# Altium PCB BlueStone_Terminal_V2.11.PcbDoc (part 2 of 2)
Units mm, origin at the board's own origin, x right, y up, seen from the top; angles counter-clockwise.
Board outline 57 x 62 mm, 2 copper layers (TopLayer, BottomLayer); 39 components, 46 nets, 230 pads, 117 vias.
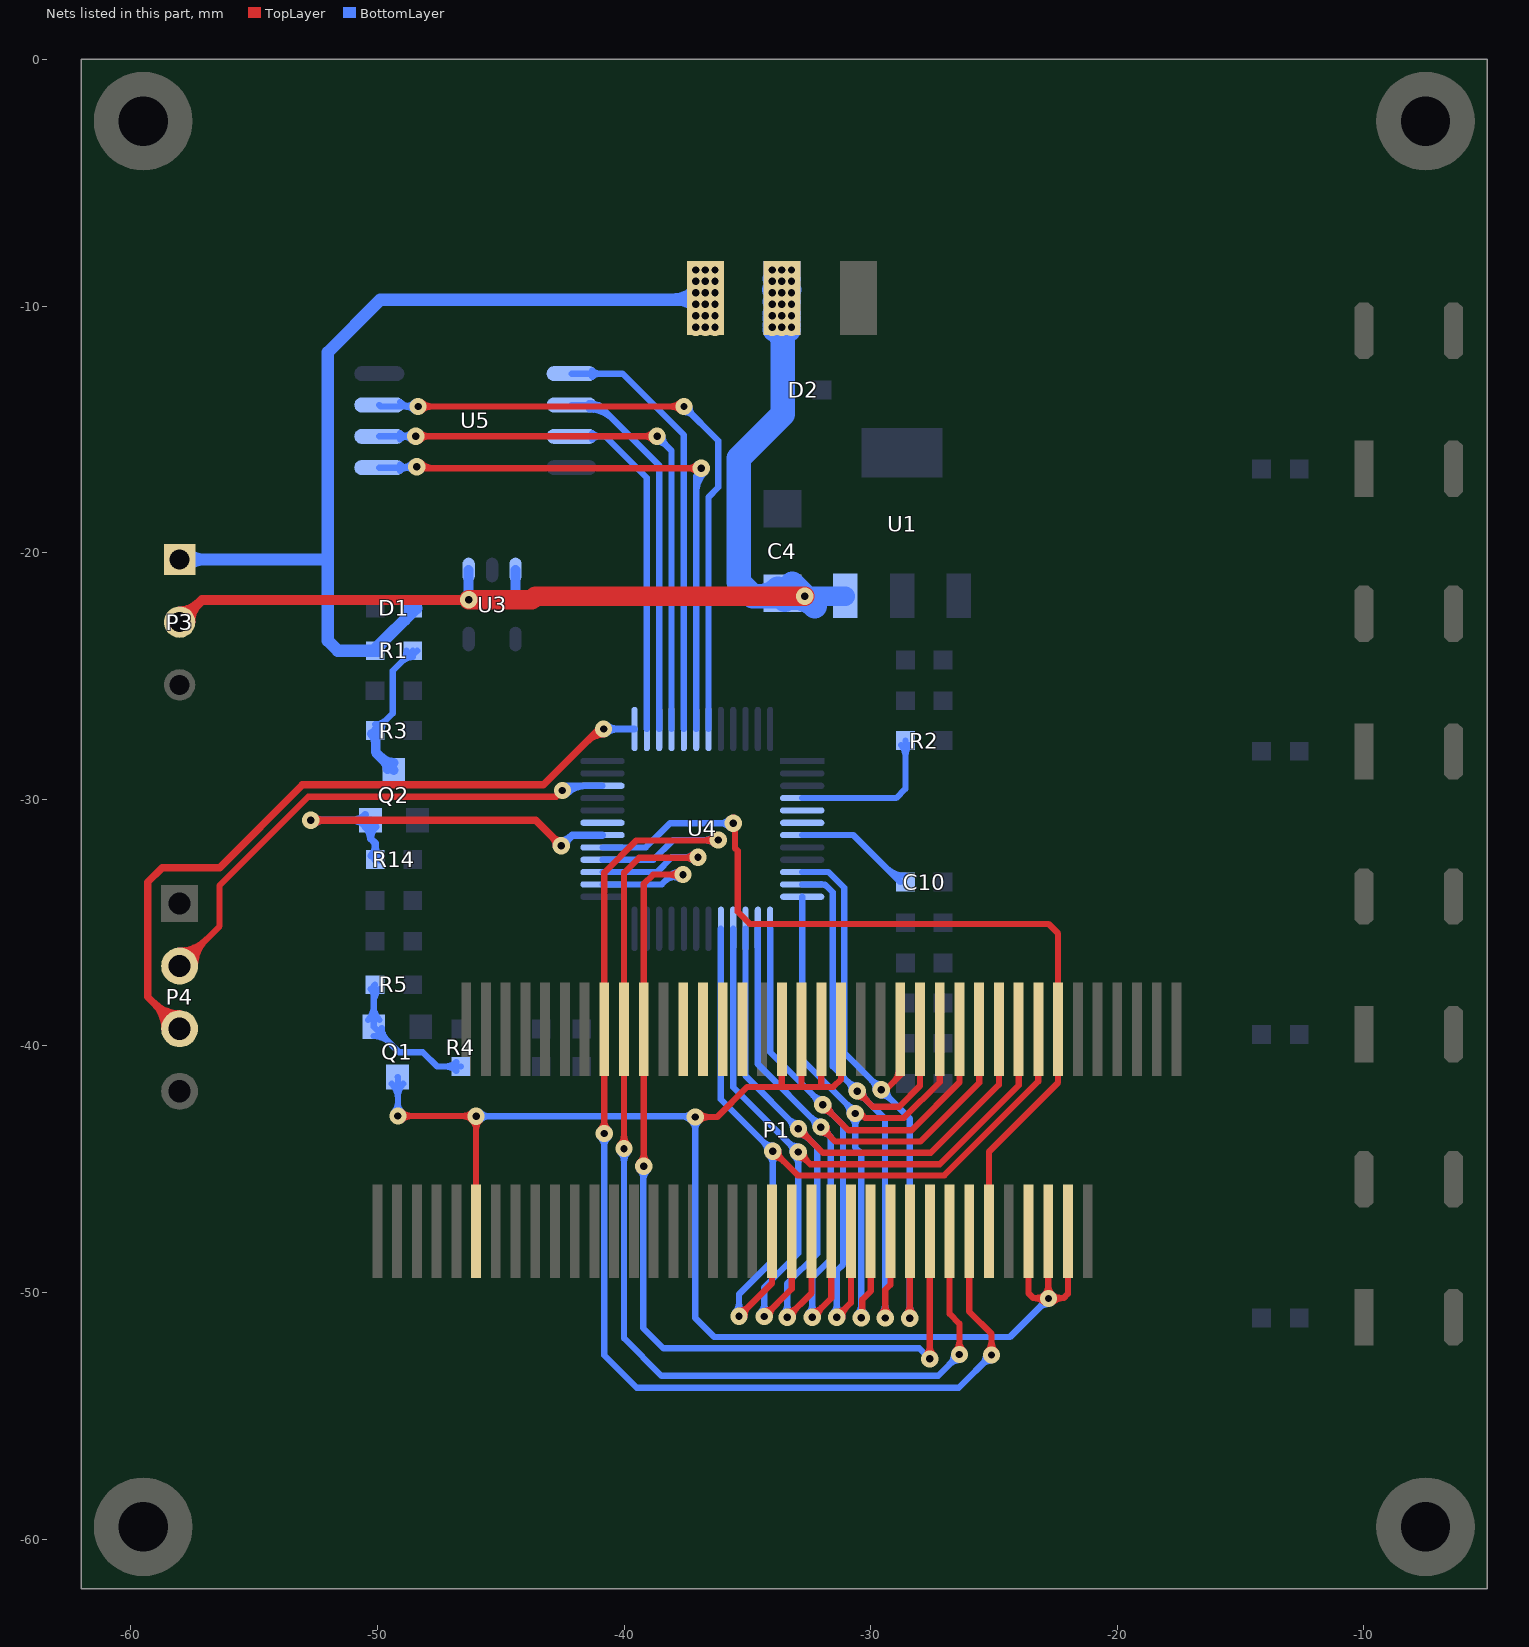
[diagram p2: the nets of this part, all layers, seen from the top]

## Via types
v1: diameter 0.7, hole 0.3, TopLayer to BottomLayer, tented both sides, 117 vias

## Nets (pads, with @x,y where several pads share a name; then routed paths per layer and width w, separated by ;. In a path a pad name is that pad's centre, name@x,y a point inside that pad or via, vN(x,y) a via of type N, cw(c..) or ccw(c..) an arc to the next point about the centre after c; other vN are vias at no path point) (continued)
LCD_DB8: P1.1_28 P1.2_23 U4.10 | length 34.8
  TopLayer w0.254: v1@-29.39,-41.78 -28.8,-41.19 P1.2_23@-28.8,-39.318 ; v1(-28.41,-51.04) P1.1_28@-28.41,-47.528 ; -28.41,-50.502 ccw(c-27.872,-50.502) -28.252,-50.882 cw(c-27.872,-50.502) -28.41,-50.502 ; -28.41,-50.502 cw(c-28.948,-50.502) -28.568,-50.882 ccw(c-28.948,-50.502) -28.41,-50.502 ; -29.046,-41.436 ccw(c-29.465,-41.018) -28.873,-41.018 cw(c-29.465,-41.018) -29.046,-41.436 ; -28.41,-49.418 cw(c-28.2,-49.418) -28.348,-49.269 ccw(c-28.2,-49.418) -28.41,-49.418
  BottomLayer w0.254: U4.10@-32.775,-32.95 -31.707,-32.95 -31.07,-33.587 -31.07,-40.28 v1(-29.57,-41.78) -28.41,-42.94 v1(-28.41,-51.04) ; -29.951,-41.399 ccw(c-29.57,-41.019) -29.57,-41.557 cw(c-29.57,-41.019) -29.951,-41.399 ; -29.951,-41.399 cw(c-30.331,-41.78) -29.793,-41.78 ccw(c-30.331,-41.78) -29.951,-41.399 ; -29.189,-42.161 ccw(c-29.57,-42.541) -29.57,-42.003 cw(c-29.57,-42.541) -29.189,-42.161 ; -29.189,-42.161 cw(c-28.809,-41.78) -29.347,-41.78 ccw(c-28.809,-41.78) -29.189,-42.161 ; -28.41,-50.502 ccw(c-27.872,-50.502) -28.252,-50.882 cw(c-27.872,-50.502) -28.41,-50.502 ; -28.41,-50.502 cw(c-28.948,-50.502) -28.568,-50.882 ccw(c-28.948,-50.502) -28.41,-50.502
LCD_DB9: P1.1_27 P1.2_24 U4.11 | length 37.6
  TopLayer w0.254: v1(-30.54,-41.83) -29.91,-42.46 -28.84,-42.46 -28,-41.62 P1.2_24@-28,-39.318 ; v1(-29.41,-51.03) -29.41,-49.89 -29.2,-49.68 P1.1_27@-29.2,-47.518 ; -30.159,-42.211 ccw(c-30.54,-42.591) -30.54,-42.053 cw(c-30.54,-42.591) -30.159,-42.211 ; -30.159,-42.211 cw(c-29.779,-41.83) -30.317,-41.83 ccw(c-29.779,-41.83) -30.159,-42.211 ; -29.41,-50.492 ccw(c-28.872,-50.492) -29.252,-50.872 cw(c-28.872,-50.492) -29.41,-50.492 ; -29.41,-50.492 cw(c-29.948,-50.492) -29.568,-50.872 ccw(c-29.948,-50.492) -29.41,-50.492
  BottomLayer w0.254: U4.11@-32.775,-33.45 -31.853,-33.45 -31.54,-33.763 -31.54,-40.83 v1(-30.54,-41.83) -29.42,-42.95 v1@-29.42,-51.03 ; -30.921,-41.449 ccw(c-30.54,-41.069) -30.54,-41.607 cw(c-30.54,-41.069) -30.921,-41.449 ; -30.921,-41.449 cw(c-31.301,-41.83) -30.763,-41.83 ccw(c-31.301,-41.83) -30.921,-41.449 ; -30.159,-42.211 ccw(c-30.54,-42.591) -30.54,-42.053 cw(c-30.54,-42.591) -30.159,-42.211 ; -30.159,-42.211 cw(c-29.779,-41.83) -30.317,-41.83 ccw(c-29.779,-41.83) -30.159,-42.211 ; U4.11@-32,-33.448 cw(c-32,-33.798) -31.753,-33.55 ccw(c-32,-33.798) U4.11@-32,-33.448 ; v1@-29.568,-50.872 ccw(c-29.924,-50.516) -29.42,-50.516 cw(c-29.924,-50.516) v1@-29.568,-50.872 ; -29.42,-50.467 ccw(c-28.847,-50.467) -29.252,-50.872 cw(c-28.847,-50.467) -29.42,-50.467
LCD_DB10: P1.1_26 P1.2_25 U4.12 | length 32.7
  TopLayer w0.254: v1(-30.38,-51.02) -30.343,-50.983 -30.343,-50.283 -30,-49.94 P1.1_26@-30,-47.518 ; v1@-30.35,-42.8 -30.232,-42.917 -28.651,-42.917 -27.2,-41.467 P1.2_25@-27.2,-39.318
  BottomLayer w0.254: U4.12@-32.775,-33.95 -32.775,-40.557 v1@-30.606,-42.726 ; v1(-30.62,-42.74) -30.62,-44.12 -30.38,-44.36 v1(-30.38,-51.02) ; -30.62,-43.278 ccw(c-31.158,-43.278) -30.778,-42.898 cw(c-31.158,-43.278) -30.62,-43.278 ; -30.62,-43.278 cw(c-30.082,-43.278) -30.462,-42.898 ccw(c-30.082,-43.278) -30.62,-43.278 ; -30.38,-50.482 ccw(c-29.842,-50.482) -30.222,-50.862 cw(c-29.842,-50.482) -30.38,-50.482 ; -30.38,-50.482 cw(c-30.918,-50.482) -30.538,-50.862 ccw(c-30.918,-50.482) -30.38,-50.482 ; -31.021,-42.311 cw(c-31.449,-42.74) -30.843,-42.74 ccw(c-31.449,-42.74) -31.021,-42.311 ; -30.953,-42.379 ccw(c-30.62,-42.046) -30.62,-42.517 cw(c-30.62,-42.046) -30.953,-42.379
LCD_DB11: P1.1_25 P1.2_26 U4.13 | length 38.2
  TopLayer w0.254: v1(-31.944,-42.386) -31.215,-43.115 ; v1@-31.764,-42.386 -31.764,-42.344 v1@-31.76,-42.34 ; v1(-31.38,-51) -30.8,-50.42 P1.1_25@-30.8,-47.518 ; -31.211,-43.111 -30.902,-43.42 -28.34,-43.42 -26.4,-41.48 P1.2_26@-26.4,-39.318 ; -31.563,-42.767 ccw(c-31.944,-43.148) -31.944,-42.609 cw(c-31.944,-43.148) -31.563,-42.767 ; -31.563,-42.767 cw(c-31.182,-42.386) -31.721,-42.386 ccw(c-31.182,-42.386) -31.563,-42.767 ; -30.999,-50.619 ccw(c-30.619,-51) -31.157,-51 cw(c-30.619,-51) -30.999,-50.619 ; -30.999,-50.619 cw(c-31.38,-50.239) -31.38,-50.777 ccw(c-31.38,-50.239) -30.999,-50.619
  BottomLayer w0.254: U4.13@-34.075,-35.25 -34.075,-40.255 v1(-31.944,-42.386) -31.12,-43.21 -31.12,-48.86 -31.38,-49.12 v1(-31.38,-51) ; -32.324,-42.006 ccw(c-31.944,-41.625) -31.944,-42.163 cw(c-31.944,-41.625) -32.324,-42.006 ; -32.324,-42.006 cw(c-32.705,-42.386) -32.167,-42.386 ccw(c-32.705,-42.386) -32.324,-42.006 ; -31.563,-42.767 ccw(c-31.944,-43.148) -31.944,-42.609 cw(c-31.944,-43.148) -31.563,-42.767 ; -31.563,-42.767 cw(c-31.182,-42.386) -31.721,-42.386 ccw(c-31.182,-42.386) -31.563,-42.767 ; -31.38,-50.462 ccw(c-30.842,-50.462) -31.222,-50.842 cw(c-30.842,-50.462) -31.38,-50.462 ; -31.38,-50.462 cw(c-31.918,-50.462) -31.538,-50.842 ccw(c-31.918,-50.462) -31.38,-50.462
LCD_DB12: P1.1_24 P1.2_27 U4.14 | length 39.5
  TopLayer w0.254: v1(-32.37,-51) -31.6,-50.23 P1.1_24@-31.6,-47.518 ; v1(-32.018,-43.289) -31.43,-43.877 -27.99,-43.877 -25.6,-41.487 P1.2_27@-25.6,-39.318 P1.2_27@-25.66,-39.378 ; v1@-31.838,-43.289 v1@-31.784,-43.289 ; -31.989,-50.619 ccw(c-31.609,-51) -32.147,-51 cw(c-31.609,-51) -31.989,-50.619 ; -31.989,-50.619 cw(c-32.37,-50.239) -32.37,-50.777 ccw(c-32.37,-50.239) -31.989,-50.619 ; -31.638,-43.67 ccw(c-32.018,-44.051) -32.018,-43.512 cw(c-32.018,-44.051) -31.638,-43.67 ; -31.638,-43.67 cw(c-31.257,-43.289) -31.795,-43.289 ccw(c-31.257,-43.289) -31.638,-43.67
  BottomLayer w0.254: U4.14@-34.575,-35.25 -34.575,-40.733 v1(-32.018,-43.289) -31.62,-43.688 -31.62,-48.64 -32.37,-49.39 v1(-32.37,-51) ; -32.399,-42.909 ccw(c-32.018,-42.528) -32.018,-43.066 cw(c-32.018,-42.528) -32.399,-42.909 ; -32.399,-42.909 cw(c-32.78,-43.289) -32.241,-43.289 ccw(c-32.78,-43.289) -32.399,-42.909 ; -32.37,-50.462 ccw(c-31.832,-50.462) -32.212,-50.842 cw(c-31.832,-50.462) -32.37,-50.462 ; -32.37,-50.462 cw(c-32.908,-50.462) -32.528,-50.842 ccw(c-32.908,-50.462) -32.37,-50.462 ; -31.638,-43.67 ccw(c-32.018,-44.051) -32.018,-43.512 cw(c-32.018,-44.051) -31.638,-43.67 ; -31.638,-43.67 cw(c-31.257,-43.289) -31.795,-43.289 ccw(c-31.257,-43.289) -31.638,-43.67
LCD_DB13: P1.1_23 P1.2_28 U4.15 | length 41
  TopLayer w0.254: v1(-33.38,-51) -32.4,-50.02 P1.1_23@-32.4,-47.518 ; v1(-32.93,-43.36) -32.91,-43.36 -31.935,-44.335 -27.565,-44.335 -24.8,-41.57 P1.2_28@-24.8,-40.018 ; -32.999,-50.619 ccw(c-32.619,-51) -33.157,-51 cw(c-32.619,-51) -32.999,-50.619 ; -32.999,-50.619 cw(c-33.38,-50.239) -33.38,-50.777 ccw(c-33.38,-50.239) -32.999,-50.619 ; v1@-32.93,-43.583 cw(c-32.93,-44.17) -32.515,-43.755 ccw(c-32.93,-44.17) v1@-32.93,-43.583 ; v1@-32.707,-43.36 ccw(c-32.217,-43.36) -32.563,-43.706 cw(c-32.217,-43.36) v1@-32.707,-43.36
  BottomLayer w0.254: U4.15@-35.075,-35.25 -35.075,-41.215 v1(-32.93,-43.36) -32.918,-43.36 -32.17,-44.108 -32.17,-48.42 -33.38,-49.63 v1(-33.38,-51) ; -33.38,-50.462 ccw(c-32.842,-50.462) -33.222,-50.842 cw(c-32.842,-50.462) -33.38,-50.462 ; -33.38,-50.462 cw(c-33.918,-50.462) -33.538,-50.842 ccw(c-33.918,-50.462) -33.38,-50.462 ; -33.311,-42.979 ccw(c-32.93,-42.599) -32.93,-43.137 cw(c-32.93,-42.599) -33.311,-42.979 ; -33.311,-42.979 cw(c-33.691,-43.36) -33.153,-43.36 ccw(c-33.691,-43.36) -33.311,-42.979 ; v1@-32.93,-43.583 cw(c-32.93,-44.15) -32.529,-43.749 ccw(c-32.93,-44.15) v1@-32.93,-43.583 ; v1@-32.707,-43.36 ccw(c-32.197,-43.36) -32.558,-43.72 cw(c-32.197,-43.36) v1@-32.707,-43.36
LCD_DB14: P1.1_22 P1.2_29 U4.16 | length 42.5
  TopLayer w0.254: v1(-34.32,-50.97) -33.2,-49.85 P1.1_22@-33.2,-47.518 ; v1(-32.94,-44.3) -32.448,-44.792 -27.202,-44.792 -24,-41.59 P1.2_29@-24,-39.318 ; v1@-32.772,-44.3 v1@-32.76,-44.3 ; -33.939,-50.589 ccw(c-33.559,-50.97) -34.097,-50.97 cw(c-33.559,-50.97) -33.939,-50.589 ; -33.939,-50.589 cw(c-34.32,-50.209) -34.32,-50.747 ccw(c-34.32,-50.209) -33.939,-50.589 ; -32.559,-44.681 ccw(c-32.94,-45.061) -32.94,-44.523 cw(c-32.94,-45.061) -32.559,-44.681 ; -32.559,-44.681 cw(c-32.179,-44.3) -32.717,-44.3 ccw(c-32.179,-44.3) -32.559,-44.681
  BottomLayer w0.254: U4.16@-35.575,-35.25 -35.575,-41.677 -32.952,-44.3 v1(-32.94,-44.3) -32.94,-47.9 -32.94,-48.41 -34.32,-49.79 v1(-34.32,-50.97) ; -34.32,-50.432 ccw(c-33.782,-50.432) -34.162,-50.812 cw(c-33.782,-50.432) -34.32,-50.432 ; -34.32,-50.432 cw(c-34.858,-50.432) -34.478,-50.812 ccw(c-34.858,-50.432) -34.32,-50.432 ; -32.94,-44.838 ccw(c-33.478,-44.838) -33.098,-44.458 cw(c-33.478,-44.838) -32.94,-44.838 ; -32.94,-44.838 cw(c-32.402,-44.838) -32.782,-44.458 ccw(c-32.402,-44.838) -32.94,-44.838 ; -33.341,-43.911 ccw(c-32.94,-43.51) -32.94,-44.077 cw(c-32.94,-43.51) -33.341,-43.911 ; -33.312,-43.94 cw(c-33.672,-44.3) -33.163,-44.3 ccw(c-33.672,-44.3) -33.312,-43.94
LCD_DB15: P1.1_21 P1.2_30 U4.17 | length 43.8
  TopLayer w0.254: v1(-35.34,-50.96) -34,-49.62 P1.1_21@-34,-47.518 ; v1(-33.97,-44.27) -33.932,-44.27 -32.953,-45.249 -27.012,-45.249 -23.2,-41.437 P1.2_30@-23.2,-40.018 ; -34.959,-50.579 ccw(c-34.579,-50.96) -35.117,-50.96 cw(c-34.579,-50.96) -34.959,-50.579 ; -34.959,-50.579 cw(c-35.34,-50.199) -35.34,-50.737 ccw(c-35.34,-50.199) -34.959,-50.579 ; v1@-33.97,-44.493 cw(c-33.97,-45.124) -33.524,-44.678 ccw(c-33.97,-45.124) v1@-33.97,-44.493 ; v1@-33.747,-44.27 ccw(c-33.301,-44.27) -33.616,-44.585 cw(c-33.301,-44.27) v1@-33.747,-44.27
  BottomLayer w0.254: U4.17@-36.075,-35.25 -36.075,-42.165 v1(-33.97,-44.27) -33.97,-48.7 -35.34,-50.07 v1(-35.34,-50.96) ; -35.34,-50.422 ccw(c-34.802,-50.422) -35.182,-50.802 cw(c-34.802,-50.422) -35.34,-50.422 ; -35.34,-50.422 cw(c-35.878,-50.422) -35.498,-50.802 ccw(c-35.878,-50.422) -35.34,-50.422 ; -34.351,-43.889 ccw(c-33.97,-43.509) -33.97,-44.047 cw(c-33.97,-43.509) -34.351,-43.889 ; -34.351,-43.889 cw(c-34.731,-44.27) -34.193,-44.27 ccw(c-34.731,-44.27) -34.351,-43.889 ; -33.97,-44.808 ccw(c-34.508,-44.808) -34.128,-44.428 cw(c-34.508,-44.808) -33.97,-44.808 ; -33.97,-44.808 cw(c-33.432,-44.808) -33.812,-44.428 ccw(c-33.432,-44.808) -33.97,-44.808
LCD_LEDK: P1.1_6 P1.1_34 P1.1_35 P1.1_36 P1.2_17 P1.2_18 P1.2_19 P1.2_20 Q1.3 | length 89.7
  TopLayer w0.254: v1(-49.17,-42.84) -46.01,-42.84 v1(-46,-42.85) P1.1_6@-46,-47.518 ; v1(-37.11,-42.88) -36.22,-42.88 -35,-41.66 -33.6,-41.66 ; P1.2_17@-33.6,-39.318 -33.6,-41.66 ; P1.2_18@-32.8,-39.318 -32.8,-41.66 ; P1.2_19@-32,-39.318 -32,-41.66 ; P1.2_20@-31.2,-39.318 -31.2,-41.35 -31.51,-41.66 -32,-41.66 ; P1.1_34@-23.6,-47.518 -23.6,-50.03 -23.41,-50.22 v1@-22.9,-50.22 ; P1.1_35@-22.8,-47.518 -22.8,-50.12 v1@-22.9,-50.22 ; P1.1_36@-22,-47.518 -22,-50.05 -22.17,-50.22 v1@-22.9,-50.22 ; -48.632,-42.84 ccw(c-48.632,-43.378) -49.012,-42.998 cw(c-48.632,-43.378) -48.632,-42.84 ; -48.632,-42.84 cw(c-48.632,-42.302) -49.012,-42.682 ccw(c-48.632,-42.302) -48.632,-42.84 ; v1@-46.158,-43.008 cw(c-46.538,-43.388) -46,-43.388 ; v1@-46.158,-43.008 ccw(c-46.563,-43.413) -46.563,-42.84 cw(c-46.563,-43.413) v1@-46.158,-43.008 ; v1@-46.158,-43.008 cw(c-46.538,-43.388) -46,-43.388 ; -46,-43.388 cw(c-45.462,-43.388) -45.842,-43.008 ccw(c-45.462,-43.388) -46,-43.388 ; -36.572,-42.88 ccw(c-36.572,-43.418) -36.952,-43.038 cw(c-36.572,-43.418) -36.572,-42.88 ; -36.572,-42.88 cw(c-36.572,-42.342) -36.952,-42.722 ccw(c-36.572,-42.342) -36.572,-42.88 ; -33.6,-41.66 -32.8,-41.66 ; -32.8,-41.66 -32,-41.66 ; v1@-22.948,-50.082 cw(c-23.28,-49.75) -23.28,-50.22 ccw(c-23.28,-49.75) v1@-22.948,-50.082 ; v1@-22.948,-50.082 ccw(c-23.304,-49.726) -22.8,-49.726 cw(c-23.304,-49.726) v1@-22.948,-50.082 ; v1@-22.632,-50.082 ccw(c-22.3,-49.75) -22.3,-50.22 cw(c-22.3,-49.75) v1@-22.632,-50.082 ; v1@-22.632,-50.082 cw(c-22.227,-49.677) -22.8,-49.677 ccw(c-22.227,-49.677) v1@-22.632,-50.082 ; -46.514,-42.84 ccw(c-46.514,-42.336) -46.158,-42.692 cw(c-46.514,-42.336) -46.514,-42.84 ; -23.377,-50.22 cw(c-23.377,-50.827) -22.948,-50.398 ccw(c-23.377,-50.827) -23.377,-50.22 ; v1@-22.632,-50.398 cw(c-22.203,-50.827) -22.203,-50.22 ccw(c-22.203,-50.827) v1@-22.632,-50.398
  BottomLayer w0.254: Q1.3@-49.185,-41.257 -49.17,-41.272 v1(-49.17,-42.84) ; v1(-46,-42.85) -37.14,-42.85 v1(-37.11,-42.88) -37.11,-51.03 -36.34,-51.8 -24.35,-51.8 v1(-22.79,-50.24) ; -49.17,-42.302 ccw(c-48.632,-42.302) -49.012,-42.682 cw(c-48.632,-42.302) -49.17,-42.302 ; -49.17,-42.302 cw(c-49.708,-42.302) -49.328,-42.682 ccw(c-49.708,-42.302) -49.17,-42.302 ; -45.462,-42.85 ccw(c-45.462,-43.388) -45.842,-43.008 cw(c-45.462,-43.388) -45.462,-42.85 ; -45.462,-42.85 cw(c-45.462,-42.312) -45.842,-42.692 ccw(c-45.462,-42.312) -45.462,-42.85 ; v1@-37.268,-43.038 cw(c-37.648,-43.418) -37.11,-43.418 ; v1@-37.268,-43.038 ccw(c-37.721,-43.491) -37.721,-42.85 cw(c-37.721,-43.491) v1@-37.268,-43.038 ; v1@-37.268,-43.038 cw(c-37.648,-43.418) -37.11,-43.418 ; -37.11,-43.418 cw(c-36.572,-43.418) -36.952,-43.038 ccw(c-36.572,-43.418) -37.11,-43.418 ; -23.171,-50.621 ccw(c-23.551,-50.24) -23.013,-50.24 cw(c-23.551,-50.24) -23.171,-50.621 ; -23.171,-50.621 cw(c-22.79,-51.001) -22.79,-50.463 ccw(c-22.79,-51.001) -23.171,-50.621 ; Q1.3@-49.418,-41.533 cw(c-50.018,-42.133) -49.17,-42.133 ccw(c-50.018,-42.133) Q1.3@-49.418,-41.533 ; -49.17,-42.061 cw(c-48.423,-42.061) -48.951,-41.533 ccw(c-48.423,-42.061) -49.17,-42.061 ; -37.576,-42.85 ccw(c-37.576,-42.414) -37.268,-42.722 cw(c-37.576,-42.414) -37.576,-42.85
LCD_RD: P1.1_29 P1.2_10 U4.26 | length 53.1
  TopLayer w0.254: v1(-39.2,-44.88) P1.2_10@-39.2,-39.318 ; P1.2_10@-39.2,-40.018 P1.2_10@-39.2,-39.318 ; v1(-37.61,-33.05) -38.82,-33.05 -39.2,-33.43 P1.2_10@-39.2,-39.318 ; v1(-27.6,-52.69) P1.1_29@-27.6,-47.518 ; -39.2,-44.342 ccw(c-38.662,-44.342) -39.042,-44.722 cw(c-38.662,-44.342) -39.2,-44.342 ; -39.2,-44.342 cw(c-39.738,-44.342) -39.358,-44.722 ccw(c-39.738,-44.342) -39.2,-44.342 ; -38.148,-33.05 ccw(c-38.148,-32.512) -37.767,-32.893 cw(c-38.148,-32.512) -38.148,-33.05 ; -38.148,-33.05 cw(c-38.148,-33.589) -37.767,-33.208 ccw(c-38.148,-33.589) -38.148,-33.05 ; -27.6,-52.152 ccw(c-27.062,-52.152) -27.442,-52.532 cw(c-27.062,-52.152) -27.6,-52.152 ; -27.6,-52.152 cw(c-28.138,-52.152) -27.758,-52.532 ccw(c-28.138,-52.152) -27.6,-52.152
  BottomLayer w0.254: U4.26@-40.875,-33.45 -38.47,-33.45 -38.07,-33.05 ; v1(-39.2,-44.88) -39.22,-44.9 -39.22,-51.44 -38.403,-52.257 -28.033,-52.257 v1(-27.6,-52.69) ; v1(-37.61,-33.05) -38.07,-33.05 ; -38.07,-33.05 ccw(c-38.07,-32.686) -37.785,-32.912 cw(c-38.07,-32.686) -38.07,-33.05 ; -38.07,-33.05 cw(c-38.07,-33.414) -37.785,-33.188 ccw(c-38.07,-33.414) -38.07,-33.05 ; v1@-39.358,-45.038 cw(c-39.69,-45.37) -39.22,-45.37 ccw(c-39.69,-45.37) v1@-39.358,-45.038 ; -39.22,-45.467 cw(c-38.613,-45.467) -39.042,-45.038 ccw(c-38.613,-45.467) -39.22,-45.467 ; -38.302,-33.282 cw(c-37.664,-33.92) -37.608,-33.019 ccw(c-37.664,-33.92) -38.302,-33.282 ; -38.3,-33.28 cw(c-37.991,-33.59) -37.738,-33.232 ccw(c-37.991,-33.59) -38.3,-33.28 ; -38.087,-33.067 cw(c-37.814,-33.34) -37.592,-33.025 ccw(c-37.814,-33.34) -38.087,-33.067
LCD_RESET: P1.1_32 P1.2_31 U4.29 | length 37.9
  TopLayer w0.254: v1@-35.57,-30.74 v1(-35.57,-30.97) -35.5,-31.04 -35.5,-31.98 -35.39,-32.09 -35.39,-34.56 -34.9,-35.05 -22.79,-35.05 -22.4,-35.44 P1.2_31@-22.4,-39.318 -22.4,-41.48 -25.2,-44.28 P1.1_32@-25.2,-47.518
  BottomLayer w0.254: U4.29@-40.875,-31.95 -39.116,-31.95 -38.136,-30.97 v1(-35.57,-30.97) ; -36.108,-30.97 ccw(c-36.108,-30.432) -35.728,-30.812 cw(c-36.108,-30.432) -36.108,-30.97 ; -36.108,-30.97 cw(c-36.108,-31.508) -35.728,-31.128 ccw(c-36.108,-31.508) -36.108,-30.97
LCD_RS: P1.1_31 P1.2_8 U4.28 | length 62.8
  TopLayer w0.254: v1(-40.8,-43.55) P1.2_8@-40.8,-39.318 ; P1.2_8@-40.8,-40.018 -40.8,-32.97 -39.5,-31.67 -36.2,-31.67 v1(-36.18,-31.65) ; P1.1_31@-26,-47.518 -26,-50.77 -25.1,-51.67 v1(-25.1,-52.53) ; -40.8,-43.012 ccw(c-40.262,-43.012) -40.642,-43.392 cw(c-40.262,-43.012) -40.8,-43.012 ; -40.8,-43.012 cw(c-41.338,-43.012) -40.958,-43.392 ccw(c-41.338,-43.012) -40.8,-43.012 ; -25.1,-51.992 ccw(c-24.562,-51.992) -24.942,-52.372 cw(c-24.562,-51.992) -25.1,-51.992 ; -25.1,-51.992 cw(c-25.638,-51.992) -25.258,-52.372 ccw(c-25.638,-51.992) -25.1,-51.992 ; -36.766,-31.67 ccw(c-36.766,-31.064) -36.337,-31.493 cw(c-36.766,-31.064) -36.766,-31.67 ; -36.67,-31.67 cw(c-36.67,-32.141) -36.337,-31.808 ccw(c-36.67,-32.141) -36.67,-31.67
  BottomLayer w0.254: U4.28@-40.875,-32.45 -38.81,-32.45 -38.01,-31.65 v1(-36.18,-31.65) ; v1(-40.8,-43.55) -40.8,-52.54 -39.48,-53.86 -26.43,-53.86 v1(-25.1,-52.53) ; -40.8,-44.088 ccw(c-41.338,-44.088) -40.958,-43.708 cw(c-41.338,-44.088) -40.8,-44.088 ; -40.8,-44.088 cw(c-40.262,-44.088) -40.642,-43.708 ccw(c-40.262,-44.088) -40.8,-44.088 ; -36.718,-31.65 ccw(c-36.718,-31.112) -36.337,-31.493 cw(c-36.718,-31.112) -36.718,-31.65 ; -36.718,-31.65 cw(c-36.718,-32.189) -36.337,-31.808 ccw(c-36.718,-32.189) -36.718,-31.65 ; -25.481,-52.911 ccw(c-25.861,-52.53) -25.323,-52.53 cw(c-25.861,-52.53) -25.481,-52.911 ; -25.481,-52.911 cw(c-25.1,-53.291) -25.1,-52.753 ccw(c-25.1,-53.291) -25.481,-52.911
LCD_RW: P1.1_30 P1.2_9 U4.27 | length 56.8
  TopLayer w0.254: v1(-40,-44.16) P1.2_9@-40,-39.318 ; P1.2_9@-40,-40.018 P1.2_9@-40,-39.318 ; v1(-37,-32.35) -37.02,-32.37 -39.39,-32.37 -40,-32.98 P1.2_9@-40,-39.318 ; P1.1_30@-26.8,-47.518 -26.8,-50.86 -26.4,-51.26 v1(-26.4,-52.51) ; -40,-43.622 ccw(c-39.462,-43.622) -39.842,-44.002 cw(c-39.462,-43.622) -40,-43.622 ; -40,-43.622 cw(c-40.538,-43.622) -40.158,-44.002 ccw(c-40.538,-43.622) -40,-43.622 ; -26.4,-51.972 ccw(c-25.862,-51.972) -26.242,-52.352 cw(c-25.862,-51.972) -26.4,-51.972 ; -26.4,-51.972 cw(c-26.938,-51.972) -26.558,-52.352 ccw(c-26.938,-51.972) -26.4,-51.972 ; -37.586,-32.37 ccw(c-37.586,-31.764) -37.157,-32.193 cw(c-37.586,-31.764) -37.586,-32.37 ; -37.49,-32.37 cw(c-37.49,-32.841) -37.157,-32.508 ccw(c-37.49,-32.841) -37.49,-32.37
  BottomLayer w0.254: U4.27@-40.875,-32.95 -38.663,-32.95 -38.063,-32.35 v1(-37,-32.35) ; v1(-40,-44.16) -40,-51.853 -38.483,-53.37 -27.318,-53.37 -27.26,-53.37 v1(-26.4,-52.51) ; -40,-44.698 ccw(c-40.538,-44.698) -40.158,-44.318 cw(c-40.538,-44.698) -40,-44.698 ; -40,-44.698 cw(c-39.462,-44.698) -39.842,-44.318 ccw(c-39.462,-44.698) -40,-44.698 ; -37.538,-32.35 ccw(c-37.538,-31.812) -37.157,-32.193 cw(c-37.538,-31.812) -37.538,-32.35 ; -37.538,-32.35 cw(c-37.538,-32.889) -37.157,-32.508 ccw(c-37.538,-32.889) -37.538,-32.35 ; -26.781,-52.891 ccw(c-27.161,-52.51) -26.623,-52.51 cw(c-27.161,-52.51) -26.781,-52.891 ; -26.781,-52.891 cw(c-26.4,-53.271) -26.4,-52.733 ccw(c-26.4,-53.271) -26.781,-52.891
NetC10_1: C10.1 U4.7 | length 6.5
  BottomLayer w0.254: U4.7@-32.775,-31.45 -30.695,-31.45 C10.1@-28.79,-33.355 ; -29.364,-32.781 ccw(c-28.592,-32.01) -28.592,-33.101 cw(c-28.592,-32.01) -29.364,-32.781
NetQ1_1: Q1.1 R4.1 R5.2 | length 14.8
  BottomLayer w0.254: R5.2@-50.1,-37.515 -50.15,-37.565 Q1.1@-50.15,-39.225 -49.125,-40.25 -48.16,-40.25 -47.576,-40.834 R4.1@-46.625,-40.834 ; -50.15,-38.385 ccw(c-49.353,-38.385) -49.917,-38.949 cw(c-49.353,-38.385) -50.15,-38.385 ; -50.15,-38.385 cw(c-50.947,-38.385) -50.383,-38.949 ccw(c-50.947,-38.385) -50.15,-38.385 ; -47.238,-40.834 ccw(c-47.238,-40.221) -46.805,-40.654 cw(c-47.238,-40.221) -47.238,-40.834 ; -47.238,-40.834 cw(c-47.238,-41.447) -46.805,-41.013 ccw(c-47.238,-41.447) -47.238,-40.834 ; R5.2@-50.274,-37.695 cw(c-50.572,-37.993) -50.15,-37.993 ccw(c-50.572,-37.993) R5.2@-50.274,-37.695 ; Q1.1@-50.15,-39.598 cw(c-50.15,-40.498) -49.513,-39.862 ccw(c-50.15,-40.498) Q1.1@-50.15,-39.598 ; -50.15,-38.263 cw(c-49.346,-38.263) -49.914,-37.695 ccw(c-49.346,-38.263) -50.15,-38.263 ; Q1.1@-49.82,-39.268 ccw(c-49.126,-39.268) -49.617,-39.758 cw(c-49.126,-39.268) Q1.1@-49.82,-39.268
NetQ2_3: Q2.3 R1.2 R3.1 | length 12.5
  BottomLayer w0.254: R3.1@-50.065,-27.21 -50.07,-27.205 -49.381,-26.516 -49.381,-24.79 R1.2@-48.566,-23.975 ; R1.2@-48.478,-24.063 R1.2@-48.39,-23.975 ; -49,-24.409 ccw(c-49.433,-23.975) -48.82,-23.975 cw(c-49.433,-23.975) -49,-24.409 ; -49,-24.409 cw(c-48.566,-24.842) -48.566,-24.229 ccw(c-48.566,-24.842) -49,-24.409 ; R3.1@-50.09,-26.956 ccw(c-50.09,-26.307) -49.631,-26.766 cw(c-50.09,-26.307) R3.1@-50.09,-26.956 ; R3.1@-49.836,-27.21 cw(c-49.259,-27.21) -49.667,-26.802 ccw(c-49.259,-27.21) R3.1@-49.836,-27.21
  BottomLayer w0.4: R3.1@-50.065,-27.21 -50.065,-28.093 Q2.3@-49.34,-28.818 ; R3.1@-50.218,-27.338 cw(c-50.587,-27.707) -50.065,-27.707 ccw(c-50.587,-27.707) R3.1@-50.218,-27.338 ; -49.852,-28.306 ccw(c-49.34,-27.794) -49.34,-28.518 cw(c-49.34,-27.794) -49.852,-28.306 ; Q2.3@-49.749,-28.409 cw(c-50.115,-28.775) -49.597,-28.775 ccw(c-50.115,-28.775) Q2.3@-49.749,-28.409
NetR2_1: R2.1 U4.4 | length 8.2
  BottomLayer w0.254: U4.4@-32.775,-29.95 -28.97,-29.95 -28.59,-29.57 R2.1@-28.59,-27.62 ; -28.59,-28.233 ccw(c-29.203,-28.233) -28.77,-27.8 cw(c-29.203,-28.233) -28.59,-28.233 ; -28.59,-28.233 cw(c-27.977,-28.233) -28.41,-27.8 ccw(c-27.977,-28.233) -28.59,-28.233
OUART_IN: D1.2 P3.1 pad.0@-36.69,-9.67 R1.1 | length 60.2
  BottomLayer w0.5: P3.1@-58.02,-20.275 -52.065,-20.275 ; D1.2@-48.426,-22.25 -50.05,-23.874 -50.05,-23.975 -51.605,-23.975 -52.01,-23.57 -52.01,-11.87 -49.88,-9.74 pad.0@-36.7,-9.74 ; -57.091,-20.275 ccw(c-57.091,-21.204) -57.748,-20.547 cw(c-57.091,-21.204) -57.091,-20.275 ; -57.091,-20.275 cw(c-57.091,-19.346) -57.748,-20.003 ccw(c-57.091,-19.346) -57.091,-20.275 ; pad.0@-36.7,-9.74 ccw(c-36.7,-10.047) -36.994,-9.959 cw(c-36.7,-10.047) pad.0@-36.7,-9.74 ; pad.0@-36.7,-9.74 cw(c-36.7,-9.45) -36.99,-9.461 ccw(c-36.7,-9.45) pad.0@-36.7,-9.74 ; pad.0@-36.7,-9.74 ccw(c-36.7,-9.45) -36.41,-9.461 cw(c-36.7,-9.45) pad.0@-36.7,-9.74 ; pad.0@-36.7,-9.74 cw(c-36.7,-10.047) -36.406,-9.959 ccw(c-36.7,-10.047) pad.0@-36.7,-9.74 ; R1.1@-49.959,-23.975 cw(c-49.495,-23.975) -49.823,-23.647 ccw(c-49.495,-23.975) R1.1@-49.959,-23.975 ; -48.889,-22.713 ccw(c-49.351,-22.25) -48.697,-22.25 cw(c-49.351,-22.25) -48.889,-22.713 ; -38.066,-9.74 ccw(c-38.066,-8.294) -37.044,-9.316 cw(c-38.066,-8.294) -38.066,-9.74 ; -37.995,-9.74 ccw(c-37.995,-8.56) -37.161,-9.394 cw(c-37.995,-8.56) -37.995,-9.74 ; -37.79,-9.74 cw(c-37.79,-10.63) -37.161,-10.001 ccw(c-37.79,-10.63) -37.79,-9.74 ; -37.728,-9.74 cw(c-37.728,-10.708) -37.044,-10.024 ccw(c-37.728,-10.708) -37.728,-9.74 ; -37.605,-9.74 ccw(c-37.605,-8.56) -36.771,-9.394 cw(c-37.605,-8.56) -37.605,-9.74 ; -37.473,-9.815 cw(c-37.372,-9.845) -37.372,-9.74 ccw(c-37.372,-9.845) -37.473,-9.815 ; pad.0@-37.4,-9.74 cw(c-37.4,-10.63) -36.771,-10.001 ccw(c-37.4,-10.63) pad.0@-37.4,-9.74 ; pad.0@-37.215,-9.74 ccw(c-37.215,-8.56) -36.381,-9.394 cw(c-37.215,-8.56) pad.0@-37.215,-9.74 ; pad.0@-37.01,-9.74 cw(c-37.01,-10.63) -36.381,-10.001 ccw(c-37.01,-10.63) pad.0@-37.01,-9.74
  other v1: -37.09,-10.86 -36.7,-10.86 -36.31,-10.86 -37.09,-10.395 -36.7,-10.395 -36.31,-10.395 -37.09,-9.93 -36.7,-9.93 -36.31,-9.93 -37.09,-9.465 -36.7,-9.465 -36.31,-9.465 -37.09,-9 -36.7,-9 -36.31,-9 -37.09,-8.535 -36.7,-8.535 -36.31,-8.535
RXD: U4.31
SPI_C\S\: U4.42 U5.1 | length 33.1
  TopLayer w0.254: v1(-48.401,-16.51) -48.341,-16.57 v1(-36.87,-16.57) ; -37.408,-16.57 ccw(c-37.408,-16.032) -37.028,-16.412 cw(c-37.408,-16.032) -37.408,-16.57 ; -37.408,-16.57 cw(c-37.408,-17.108) -37.028,-16.728 ccw(c-37.408,-17.108) -37.408,-16.57 ; v1@-48.243,-16.668 cw(c-48.007,-16.904) -48.007,-16.57 ccw(c-48.007,-16.904) v1@-48.243,-16.668 ; v1@-48.243,-16.352 ccw(c-47.718,-15.827) -47.718,-16.57 cw(c-47.718,-15.827) v1@-48.243,-16.352
  BottomLayer w0.254: U5.1@-49.925,-16.55 -48.441,-16.55 v1(-48.401,-16.51) ; U4.42@-37.075,-27.15 -37.075,-16.895 -36.87,-16.69 v1(-36.87,-16.57) ; -48.785,-16.55 ccw(c-48.785,-16.979) -49.088,-16.676 cw(c-48.785,-16.979) -48.785,-16.55 ; -48.785,-16.55 cw(c-48.785,-16.121) -49.088,-16.424 ccw(c-48.785,-16.121) -48.785,-16.55 ; U5.1@-49.036,-16.55 ccw(c-49.036,-15.875) -48.559,-16.352 cw(c-49.036,-15.875) U5.1@-49.036,-16.55 ; -48.843,-16.55 cw(c-48.843,-16.952) -48.559,-16.668 ccw(c-48.843,-16.952) -48.843,-16.55 ; -37.075,-17.603 cw(c-35.836,-17.603) -36.712,-16.728 ccw(c-35.836,-17.603) -37.075,-17.603 ; -37.075,-16.99 cw(c-36.45,-16.99) -36.892,-16.548 ccw(c-36.45,-16.99) -37.075,-16.99
SPI_CLK: U4.39 U5.6 | length 19
  BottomLayer w0.254: U5.6@-42.125,-14.01 -41.03,-14.01 -38.575,-16.465 -38.575,-19.26 ; U4.39@-38.575,-27.15 -38.575,-19.26 ; -38.575,-18.801 -38.575,-19.26 ; U5.6@-41.414,-14.188 cw(c-41.414,-15.544) -40.455,-14.585 ccw(c-41.414,-15.544) U5.6@-41.414,-14.188 ; U5.6@-41.414,-13.934 cw(c-41.414,-14.676) -40.889,-14.151 ccw(c-41.414,-14.676) U5.6@-41.414,-13.934
SPI_HOLD: U4.38 U5.7 | length 15.6
  BottomLayer w0.254: U5.7@-42.125,-15.28 -40.76,-15.28 -39.075,-16.965 -39.075,-19.24 ; U4.38@-39.075,-27.15 -39.075,-19.24 ; -39.075,-18.948 -39.075,-19.24 ; -40.985,-15.28 ccw(c-40.985,-15.709) -41.288,-15.406 cw(c-40.985,-15.709) -40.985,-15.28 ; -40.985,-15.28 cw(c-40.985,-14.851) -41.288,-15.154 ccw(c-40.985,-14.851) -40.985,-15.28
SPI_MISO: U4.40 U5.2 | length 31.9
  TopLayer w0.254: v1(-48.441,-15.28) v1(-38.66,-15.28) ; -47.903,-15.28 ccw(c-47.903,-15.818) -48.283,-15.438 cw(c-47.903,-15.818) -47.903,-15.28 ; -47.903,-15.28 cw(c-47.903,-14.742) -48.283,-15.122 ccw(c-47.903,-14.742) -47.903,-15.28 ; -39.198,-15.28 ccw(c-39.198,-14.742) -38.818,-15.122 cw(c-39.198,-14.742) -39.198,-15.28 ; -39.198,-15.28 cw(c-39.198,-15.818) -38.818,-15.438 ccw(c-39.198,-15.818) -39.198,-15.28
  BottomLayer w0.254: U5.2@-49.925,-15.28 v1(-48.441,-15.28) ; v1(-38.66,-15.28) -38.075,-15.865 -38.075,-16.25 -38.075,-17.49 -38.075,-19.1 ; U4.40@-38.075,-27.15 -38.075,-19.1 ; -38.075,-18.655 -38.075,-19.1 ; U5.2@-48.979,-15.28 ccw(c-48.979,-14.742) -48.599,-15.122 cw(c-48.979,-14.742) U5.2@-48.979,-15.28 ; U5.2@-48.979,-15.28 cw(c-48.979,-15.818) -48.599,-15.438 ccw(c-48.979,-15.818) U5.2@-48.979,-15.28 ; v1@-48.785,-15.28 ccw(c-48.785,-15.709) -49.088,-15.406 cw(c-48.785,-15.709) v1@-48.785,-15.28 ; v1@-48.785,-15.28 cw(c-48.785,-14.851) -49.088,-15.154 ccw(c-48.785,-14.851) v1@-48.785,-15.28 ; -38.279,-15.661 ccw(c-38.66,-16.041) -38.66,-15.503 cw(c-38.66,-16.041) -38.279,-15.661 ; -38.279,-15.661 cw(c-37.899,-15.28) -38.437,-15.28 ccw(c-37.899,-15.28) -38.279,-15.661
SPI_MOSI: U4.41 U5.5 | length 19.4
  BottomLayer w0.254: U5.5@-42.125,-12.74 -40.06,-12.74 -37.575,-15.225 -37.575,-19.01 ; U4.41@-37.575,-27.15 -37.575,-19.01 ; -37.575,-18.508 -37.575,-19.01 ; -40.985,-12.74 ccw(c-40.985,-13.169) -41.288,-12.866 cw(c-40.985,-13.169) -40.985,-12.74 ; -40.985,-12.74 cw(c-40.985,-12.311) -41.288,-12.614 ccw(c-40.985,-12.311) -40.985,-12.74
SPI_WP: U4.43 U5.3 | length 34
  TopLayer w0.254: v1(-48.351,-14.07) v1(-37.57,-14.07) ; -47.813,-14.07 ccw(c-47.813,-14.608) -48.193,-14.228 cw(c-47.813,-14.608) -47.813,-14.07 ; -47.813,-14.07 cw(c-47.813,-13.532) -48.193,-13.912 ccw(c-47.813,-13.532) -47.813,-14.07 ; -38.108,-14.07 ccw(c-38.108,-13.532) -37.728,-13.912 cw(c-38.108,-13.532) -38.108,-14.07 ; -38.108,-14.07 cw(c-38.108,-14.608) -37.728,-14.228 ccw(c-38.108,-14.608) -38.108,-14.07
  BottomLayer w0.254: U5.3@-49.925,-14.01 -49.865,-14.07 v1(-48.351,-14.07) ; v1(-37.57,-14.07) -36.18,-15.46 -36.18,-15.824 -36.18,-17.35 -36.575,-17.745 U4.43@-36.575,-27.15 ; -48.889,-14.07 ccw(c-48.889,-13.532) -48.509,-13.912 cw(c-48.889,-13.532) -48.889,-14.07 ; -48.889,-14.07 cw(c-48.889,-14.608) -48.509,-14.228 ccw(c-48.889,-14.608) -48.889,-14.07 ; -37.189,-14.451 ccw(c-37.57,-14.831) -37.57,-14.293 cw(c-37.57,-14.831) -37.189,-14.451 ; -37.189,-14.451 cw(c-36.809,-14.07) -37.347,-14.07 ccw(c-36.809,-14.07) -37.189,-14.451 ; U5.3@-49.088,-13.884 ccw(c-48.64,-13.436) -48.64,-14.07 cw(c-48.64,-13.436) U5.3@-49.088,-13.884
SWCLK: P4.3 U4.37 | length 36.8
  TopLayer w0.3: -59.32,-36.48 -59.32,-36 ; P4.3@-58.02,-39.3 -59.32,-38 -59.32,-36 ; v1(-40.83,-27.15) -41.004,-27.15 -43.264,-29.41 -53.04,-29.41 -56.4,-32.77 -58.73,-32.77 -59.32,-33.36 -59.32,-36 ; -59.044,-38.276 ccw(c-58.02,-37.251) -58.02,-38.7 cw(c-58.02,-37.251) -59.044,-38.276 ; -59.044,-38.276 cw(c-60.069,-39.3) -58.62,-39.3 ccw(c-60.069,-39.3) -59.044,-38.276 ; -41.469,-27.615 cw(c-40.83,-28.254) -40.83,-27.35 ccw(c-40.83,-28.254) -41.469,-27.615
  BottomLayer w0.3: v1(-40.83,-27.15) U4.37@-39.575,-27.15 ; -40.347,-27.15 ccw(c-40.347,-27.633) -40.689,-27.291 cw(c-40.347,-27.633) -40.347,-27.15 ; -40.347,-27.15 cw(c-40.347,-26.667) -40.689,-27.009 ccw(c-40.347,-26.667) -40.347,-27.15
SWDIO: P4.2 U4.34 | length 31.2
  TopLayer w0.254: P4.2@-58.02,-36.76 -56.4,-35.14 -56.4,-33.49 -52.8,-29.89 -42.75,-29.89 v1(-42.5,-29.64) ; -57.39,-36.13 ccw(c-56.76,-36.76) -57.651,-36.76 cw(c-56.76,-36.76) -57.39,-36.13 ; -57.39,-36.13 cw(c-58.02,-35.5) -58.02,-36.391 ccw(c-58.02,-35.5) -57.39,-36.13 ; -56.956,-35.696 ccw(c-55.893,-36.76) -57.397,-36.76 cw(c-55.893,-36.76) -56.956,-35.696 ; -56.956,-35.696 cw(c-58.02,-34.633) -58.02,-36.137 ccw(c-58.02,-34.633) -56.956,-35.696
  BottomLayer w0.254: v1@-42.31,-29.45 U4.34@-40.875,-29.45 ; v1@-42.522,-29.618 cw(c-42.116,-30.024) -42.116,-29.45 ccw(c-42.116,-30.024) v1@-42.522,-29.618 ; v1@-42.342,-29.798 cw(c-41.503,-30.637) -41.503,-29.45 ccw(c-41.503,-30.637) v1@-42.342,-29.798
TXD: Q2.2 R14.1 U4.30 | length 28.9
  TopLayer w0.3: v1(-52.7,-30.85) -43.58,-30.85 v1(-42.55,-31.88) ; -52.217,-30.85 ccw(c-52.217,-31.333) -52.559,-30.991 cw(c-52.217,-31.333) -52.217,-30.85 ; -52.217,-30.85 cw(c-52.217,-30.367) -52.559,-30.709 ccw(c-52.217,-30.367) -52.217,-30.85 ; -42.891,-31.539 ccw(c-42.55,-31.197) -42.55,-31.68 cw(c-42.55,-31.197) -42.891,-31.539 ; -42.891,-31.539 cw(c-43.233,-31.88) -42.75,-31.88 ccw(c-43.233,-31.88) -42.891,-31.539
  BottomLayer w0.3: v1(-52.7,-30.85) Q2.2@-50.28,-30.85 -50.28,-31.59 ; R14.1@-49.935,-32.445 R14.1@-50.09,-32.445 -50.09,-31.78 -50.28,-31.59 ; v1@-42.536,-31.88 -42.106,-31.45 U4.30@-40.875,-31.45 ; -52.217,-30.85 ccw(c-52.217,-31.333) -52.559,-30.991 cw(c-52.217,-31.333) -52.217,-30.85 ; -52.217,-30.85 cw(c-52.217,-30.367) -52.559,-30.709 ccw(c-52.217,-30.367) -52.217,-30.85 ; -51.022,-30.85 ccw(c-51.022,-30.108) -50.497,-30.633 cw(c-51.022,-30.108) -51.022,-30.85 ; -51.022,-30.85 cw(c-51.022,-31.592) -50.497,-31.067 ccw(c-51.022,-31.592) -51.022,-30.85 ; -50.28,-31.59 ccw(c-50.917,-31.59) -50.487,-31.12 cw(c-50.917,-31.59) -50.28,-31.59 ; -50.28,-31.59 cw(c-49.643,-31.59) -50.073,-31.12 ccw(c-49.643,-31.59) -50.28,-31.59 ; -50.09,-31.887 ccw(c-49.532,-31.887) -49.927,-32.282 cw(c-49.532,-31.887) -50.09,-31.887 ; -50.09,-31.887 cw(c-50.648,-31.887) -50.253,-32.282 ccw(c-50.648,-31.887) -50.09,-31.887 ; v1@-42.55,-31.68 ccw(c-42.55,-31.164) -42.185,-31.529 cw(c-42.55,-31.164) v1@-42.55,-31.68 ; v1@-42.35,-31.88 cw(c-41.9,-31.88) -42.218,-31.562 ccw(c-41.9,-31.88) v1@-42.35,-31.88
VBAT: C4.1 D2.2 P3.2 pad.0@-33.59,-9.67 U1.3 U3.1 U3.3 | length 90.2
  TopLayer w0.4: P3.2@-57.74,-22.815 P3.2@-58.02,-22.815 -57.115,-21.91 v1(-46.3,-21.91) v1@-46.29,-21.91 ; -57.277,-22.072 ccw(c-56.535,-22.815) -57.585,-22.815 cw(c-56.535,-22.815) -57.277,-22.072 ; -57.277,-22.072 cw(c-58.02,-21.33) -58.02,-22.38 ccw(c-58.02,-21.33) -57.277,-22.072 ; -46.662,-21.91 ccw(c-46.662,-21.548) -46.406,-21.804 cw(c-46.662,-21.548) -46.662,-21.91 ; -46.662,-21.91 cw(c-46.662,-22.272) -46.406,-22.016 ccw(c-46.662,-22.272) -46.662,-21.91
  TopLayer w0.8: v1(-46.3,-21.91) -43.74,-21.91 -43.59,-21.76 v1(-32.67,-21.76)
  BottomLayer w0.4: P3.2@-58.02,-22.815 P3.2@-57.995,-22.79 ; U3.1@-46.3,-20.7 -46.3,-21.78 -46.16,-21.92 -44.66,-21.92 -44.4,-21.66 U3.3@-44.4,-20.7 ; -46.3,-21.548 ccw(c-45.938,-21.548) v1@-46.194,-21.804 ; -46.3,-21.548 cw(c-46.662,-21.548) -46.406,-21.804 ccw(c-46.662,-21.548) -46.3,-21.548 ; -46.3,-21.548 ccw(c-45.938,-21.548) v1@-46.194,-21.804 ; v1@-46.194,-21.804 ccw(c-45.914,-21.524) -45.914,-21.92 cw(c-45.914,-21.524) v1@-46.194,-21.804
  BottomLayer w0.8: U1.3@-31.035,-21.76 v1(-32.67,-21.76) ; v1(-32.67,-21.76) cw(c-32.67,-21.018) -33.278,-21.443 ccw(c-32.67,-21.018) v1(-32.67,-21.76) ; C4.1@-33.319,-21.394 ccw(c-32.435,-20.51) -32.435,-21.76 cw(c-32.435,-20.51) C4.1@-33.319,-21.394
  BottomLayer w1: pad.0@-33.57,-9.67 -33.57,-14.388 -35.35,-16.168 -35.35,-21.19 -34.78,-21.76 v1(-32.67,-21.76) C4.1@-33.178,-21.253 ; pad.0@-33.884,-8.894 cw(c-34.642,-9.652) pad.0@-33.57,-9.652 ; pad.0@-33.884,-8.894 cw(c-34.642,-9.652) pad.0@-33.57,-9.652 ; pad.0@-33.884,-8.894 cw(c-34.642,-9.652) pad.0@-33.57,-9.652 ; pad.0@-33.884,-8.894 cw(c-34.642,-9.652) pad.0@-33.57,-9.652 ; pad.0@-33.57,-9.507 cw(c-32.703,-9.507) pad.0@-33.316,-8.894 ; pad.0@-33.57,-9.507 cw(c-32.703,-9.507) pad.0@-33.316,-8.894 ; pad.0@-33.57,-9.507 cw(c-32.703,-9.507) pad.0@-33.316,-8.894 ; pad.0@-33.57,-9.507 cw(c-32.703,-9.507) pad.0@-33.316,-8.894 ; -34.473,-21.76 ccw(c-34.473,-20.752) -33.76,-21.465 cw(c-34.473,-20.752) -34.473,-21.76 ; pad.0@-33.915,-9.335 cw(c-34.259,-9.932) -33.57,-9.932 ccw(c-34.259,-9.932) pad.0@-33.915,-9.335 ; pad.0@-33.884,-10.966 ccw(c-34.642,-10.208) -33.57,-10.208 cw(c-34.642,-10.208) pad.0@-33.884,-10.966 ; pad.0@-33.884,-10.754 cw(c-34.642,-11.512) -33.57,-11.512 ccw(c-34.642,-11.512) pad.0@-33.884,-10.754 ; pad.0@-33.884,-10.501 ccw(c-34.642,-9.743) -33.57,-9.743 cw(c-34.642,-9.743) pad.0@-33.884,-10.501 ; pad.0@-33.884,-10.289 cw(c-34.642,-11.047) -33.57,-11.047 ccw(c-34.642,-11.047) pad.0@-33.884,-10.289 ; pad.0@-33.884,-9.824 cw(c-34.642,-10.582) -33.57,-10.582 ccw(c-34.642,-10.582) pad.0@-33.884,-9.824 ; pad.0@-33.884,-9.359 cw(c-34.642,-10.117) -33.57,-10.117 ccw(c-34.642,-10.117) pad.0@-33.884,-9.359 ; -33.57,-11.367 cw(c-32.703,-11.367) -33.316,-10.754 ccw(c-32.703,-11.367) -33.57,-11.367 ; pad.0@-33.57,-10.902 cw(c-32.703,-10.902) -33.316,-10.289 ccw(c-32.703,-10.902) pad.0@-33.57,-10.902 ; pad.0@-33.57,-10.437 cw(c-32.703,-10.437) -33.316,-9.824 ccw(c-32.703,-10.437) pad.0@-33.57,-10.437 ; pad.0@-33.57,-10.353 ccw(c-32.703,-10.353) -33.316,-10.966 cw(c-32.703,-10.353) pad.0@-33.57,-10.353 ; pad.0@-33.57,-9.972 cw(c-32.703,-9.972) -33.316,-9.359 ccw(c-32.703,-9.972) pad.0@-33.57,-9.972 ; pad.0@-33.57,-9.888 ccw(c-32.703,-9.888) -33.316,-10.501 cw(c-32.703,-9.888) pad.0@-33.57,-9.888 ; pad.0@-33.57,-9.879 cw(c-32.906,-9.879) -33.299,-9.344 ccw(c-32.906,-9.879) pad.0@-33.57,-9.879 ; C4.1@-33.483,-21.895 cw(c-33.081,-22.966) -32.273,-22.157 ccw(c-33.081,-22.966) C4.1@-33.483,-21.895 ; C4.1@-33.39,-21.465 ccw(c-32.677,-20.752) -32.677,-21.76 cw(c-32.677,-20.752) C4.1@-33.39,-21.465
  other v1: -33.99,-10.86 -33.6,-10.86 -33.21,-10.86 -33.99,-10.395 -33.6,-10.395 -33.21,-10.395 -33.99,-9.93 -33.6,-9.93 -33.21,-9.93 -33.99,-9.465 -33.6,-9.465 -33.21,-9.465 -33.99,-9 -33.6,-9 -33.21,-9 -33.99,-8.535 -33.6,-8.535 -33.21,-8.535
X+: P1.2_12
X-: P1.2_14
XIN: U4.5
XOUT: U4.6
Y+: P1.2_15
Y-: P1.2_13
pads on no net: P1.1_1 P1.1_2 P1.1_3 P1.1_4 P1.1_8 P1.1_10 P1.1_13 P1.1_14 P1.1_15 P1.1_16 P1.1_17 P1.1_18 P1.1_19 P1.1_20 P1.2_21 S1.3 S1.4 S2.3 S2.4 S3.3 S3.4 S4.3 S4.4 U3.4 U4.2 U4.3 U4.21 U4.22 U4.32 U4.33 U4.45 U4.46

## Polygon pours and split planes (outlines as drawn)
DGND on TopLayer "BottomLayer-No Net" (solid, pour order 1000): -5,-62 -5,0 -62,0 -62,-62
DGND on BottomLayer "BottomLayer-No Net" (solid, pour order 1001): -62,-62 -62,0 -5,0 -5,-62

## Keep-outs
KeepOutLayer:
  the board outline again, w0.2

## Other copper
TopLayer:
  rectangle net DGND: -31.7,-11.05 -29.19,-8.32
  rectangle net DGND: -31.09,-11.84 -29.92,-7.61
  rectangle net DGND: -47.73,-20.28 -46.09,-18.69
  rectangle net DGND: -50.76,-21.39 -49.04,-19.89
  rectangle net DGND: -45.739,-25.67 -39.89,-23.25
  rectangle net DGND: -16.42,-40.57 -15.07,-38.35
  rectangle net DGND: -43.88,-34.69 -42.27,-32.92
BottomLayer:
  rectangle net DGND: -31.1,-12.23 -29.79,-7.56
  rectangle net DGND: -31.77,-11.07 -28.04,-8.36
  rectangle net DGND: -43.589,-34.68 -42.28,-32.95
  rectangle net DGND: -47.39,-35 -45.84,-33.29
  rectangle net DGND: -41.55,-25.37 -40.18,-22.91
  rectangle net DGND: -45.79,-25.68 -44.26,-24.26
  rectangle net DGND: -47.46,-19.71 -45.69,-18.79
  rectangle net DGND: -47.79,-20.33 -46.86,-18.62
  rectangle net DGND: -50.68,-21.42 -48.93,-19.95

## Silkscreen, mask and mechanical layers (free items; w line width, h text height)
TopOverlay:
  rectangle: -55.1,-60.93 -12.93,-50.67
  rectangle: -55.1,-36.9 -12.92,-1.11
  rectangle: -55.1,-45.28 -12.93,-41.75
  lines w0.254: -61.565,-23.063 -59.609,-23.063 ; -61.413,-21.564 -61.413,-20.98 -59.889,-20.98 -59.889,-20.015 -61.413,-20.015 -61.413,-19.405 ; -60.6,-26.441 -60.6,-24.714 ; -60.6,-24.003 -60.6,-22.047
  text "OK" at -9.42,-19.63 h2
  text "CANCEL" at -12.26,-31.17 h2
  text "UP" at -9.24,-42.46 h2
  text "DOWN" at -10.93,-53.85 h2
BottomOverlay:
  lines w0.254: -61.311,-22.988 -59.355,-22.988 ; -60.32,-26.366 -60.32,-24.639 ; -60.32,-23.928 -60.32,-21.972 ; -59.507,-21.489 -59.507,-20.905 -61.031,-20.905 -61.031,-19.94 -59.507,-19.94 -59.507,-19.33 ; -37.79,-6.713 -37.18,-6.713 -37.18,-5.189 -36.215,-5.189 -36.215,-6.713 -35.631,-6.713 ; -34.548,-5.9 -32.592,-5.9 ; -33.532,-6.865 -33.532,-4.909 ; -31.381,-5.9 -29.654,-5.9
  text "BlueStone Terminal V2.11" at -13.63,1.82 h4
  text "BlueStone Terminal V2.11" at -32.71,-58.8 h1.8
  text "nter@tom.com" at -37.63,-60.48 h1.6

## Text inside footprints (layer, text, board x,y; h text height)
P1: TopOverlay "37" at -16.85,-38.268 h1.52; TopOverlay "1" at -47.7,-38.193 h1.52; TopOverlay "37" at -20.34,-46.47 h1.52; TopOverlay "1" at -51.32,-46.53 h1.52